# EAGLE board STM32F765VIT6 EAGLE (EAGLE 7.5.0)
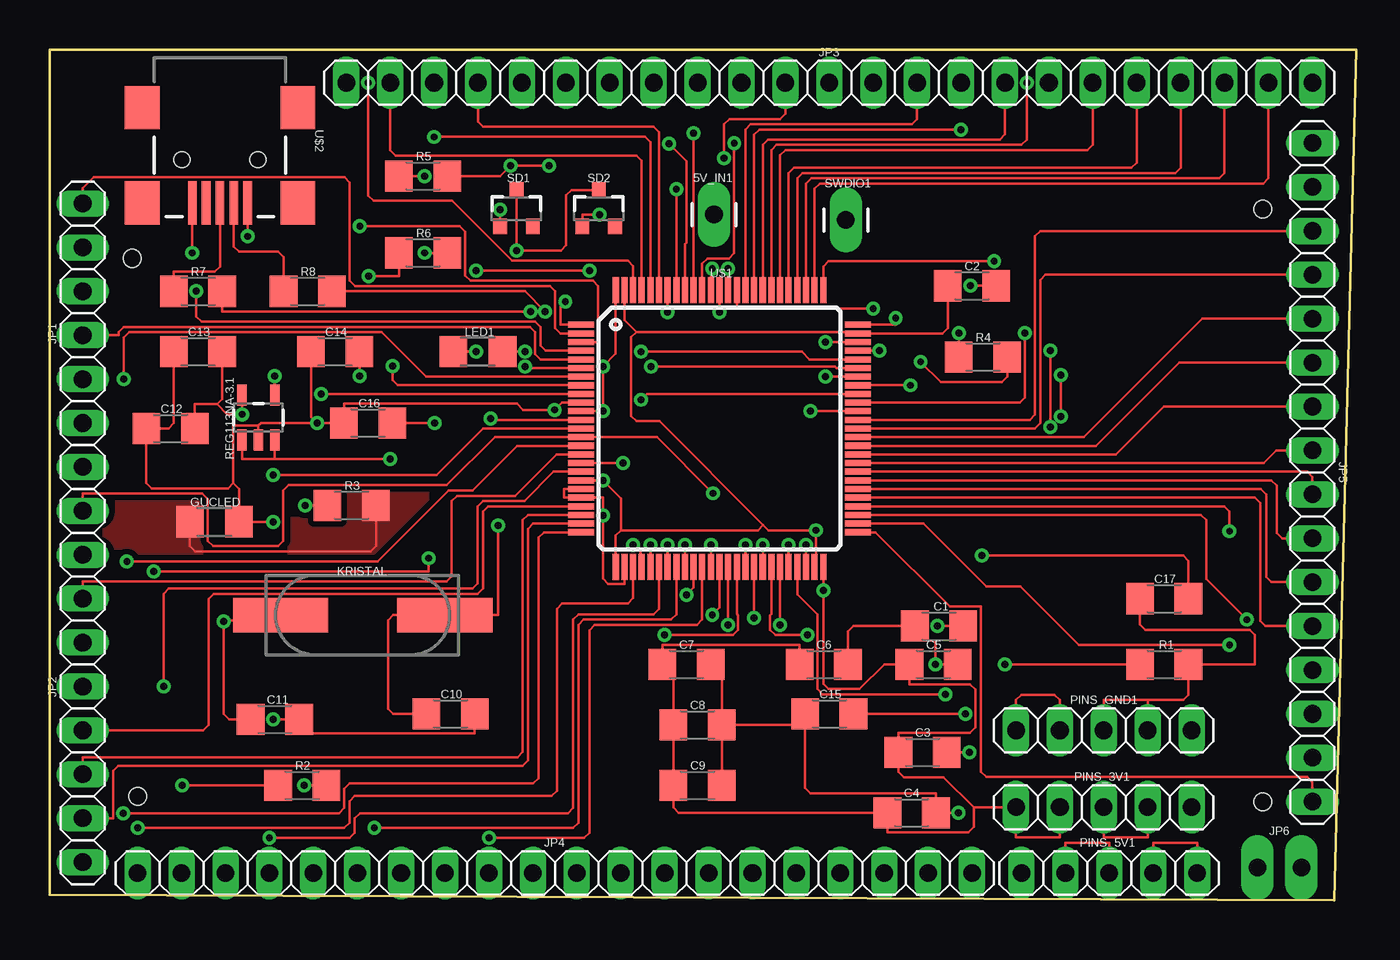
[diagram p0: board, top side]
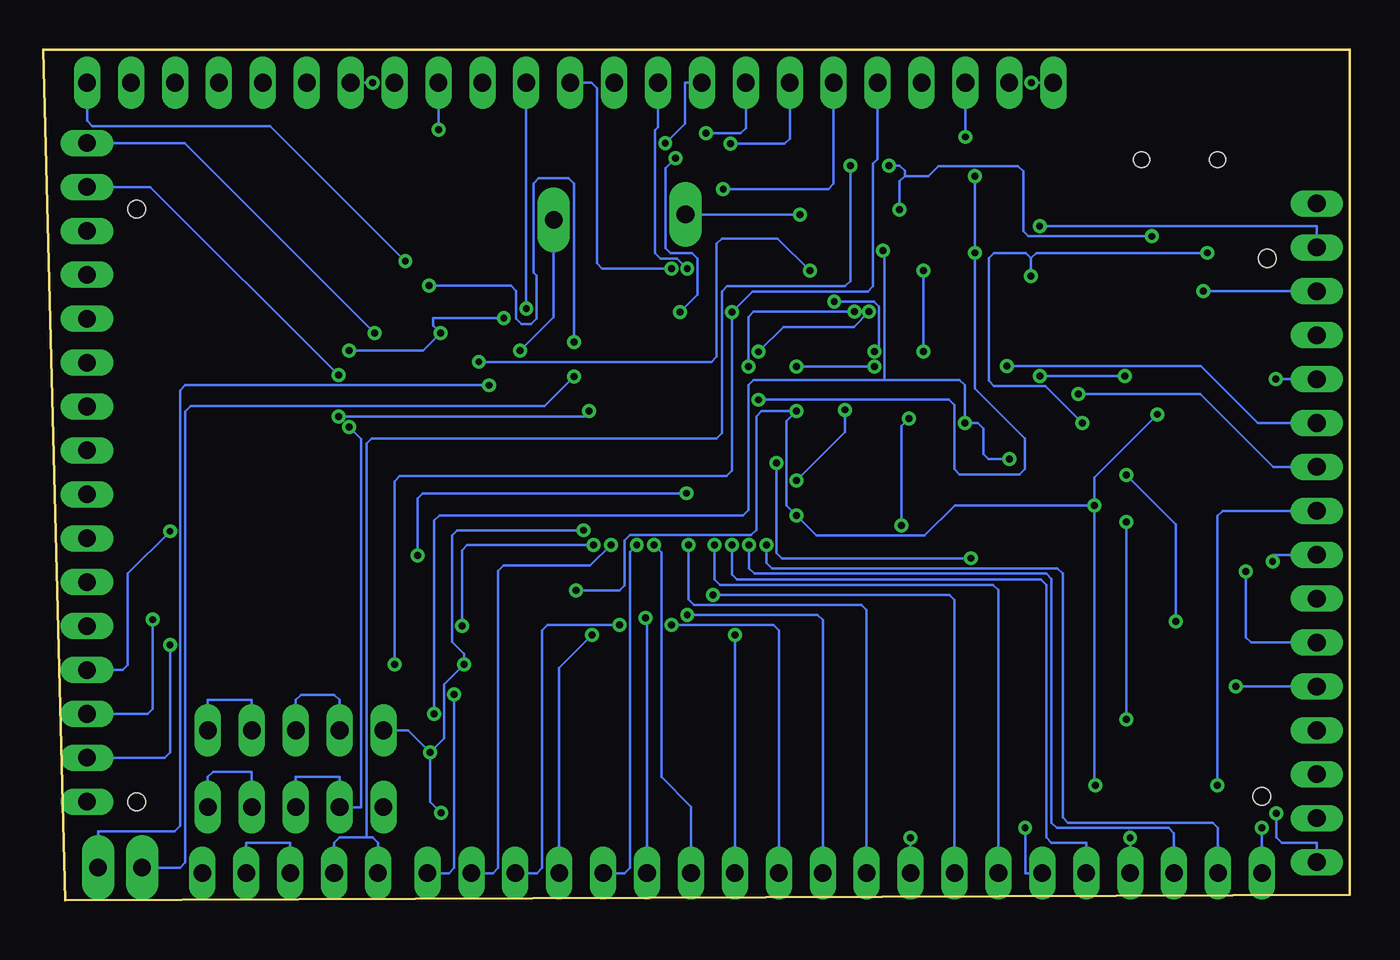
[diagram p1: board, bottom side, seen from below]

Size 75.56 x 49.21 mm. Coordinates in mm from the lower left corner, seen from the top.
Outline: 0,49.21 0,0.32 74.3,0 75.56,49.21 0,49.21
Copper layers (1*16): Top 0.035mm / dielectric 1.5mm / Bottom 0.035mm
Design rules "default *": minimum track width 10mil, minimum drill 0.61mm, track to track 8mil, track to pad 8mil, pad to pad 8mil, via to via 8mil, smd to smd 8mil, copper to edge 40mil, drill to drill 8mil, minimum pad ring 0mil, minimum via ring 8mil, stop-mask expansion 2mil, vias tented up to drill 16mil, thermal gap 10mil
Net classes: 0 default: width 0.152 mm, clearance 0.152 mm
Holes 1 mm at 70.17,40.01 70.17,5.72 5.08,6.03 4.76,37.15

## Footprints (pad centres in the part's own frame; a part is rotated, then mirrored left to right if it is on the bottom)
1X01_LONGPAD = drill 1.016 pad 1.88 long: 1 0,0
1206 = smd 1.6 x 1.8: 1 -1.4,0; 2 1.4,0
1206_GUCLED = smd 1.6 x 1.803: 1 -1.422,0; 2 1.422,0
1X07 = drill 1.016 pad 1.524 long: 1 -7.62,0; 2 -5.08,0; 3 -2.54,0; 4 0,0; 5 2.54,0; 6 5.08,0; 7 7.62,0
1X09 = drill 1.016 pad 1.524 long: 1 -10.16,0; 2 -7.62,0; 3 -5.08,0; 4 -2.54,0; 5 0,0; 6 2.54,0; 7 5.08,0; 8 7.62,0; 9 10.16,0
1X23 = drill 1.016 pad 1.524 long: 1 -26.67,0; 2 -24.13,0; 3 -21.59,0; 4 -19.05,0; 5 -16.51,0; 6 -13.97,0; 7 -11.43,0; 8 -8.89,0; 9 -6.35,0; 10 -3.81,0; 11 -1.27,0; 12 1.27,0; 13 3.81,0; 14 6.35,0; 15 8.89,0; 16 11.43,0; 17 13.97,0; 18 16.51,0; 19 19.05,0; 20 21.59,0; 21 24.13,0; 22 26.67,0; 23 29.21,0
1X20 = drill 1.016 pad 1.524 long: 1 -24.13,0; 2 -21.59,0; 3 -19.05,0; 4 -16.51,0; 5 -13.97,0; 6 -11.43,0; 7 -8.89,0; 8 -6.35,0; 9 -3.81,0; 10 -1.27,0; 11 1.27,0; 12 3.81,0; 13 6.35,0; 14 8.89,0; 15 11.43,0; 16 13.97,0; 17 16.51,0; 18 19.05,0; 19 21.59,0; 20 24.13,0
1X16 = drill 1.016 pad 1.524 long: 1 -19.05,0; 2 -16.51,0; 3 -13.97,0; 4 -11.43,0; 5 -8.89,0; 6 -6.35,0; 7 -3.81,0; 8 -1.27,0; 9 1.27,0; 10 3.81,0; 11 6.35,0; 12 8.89,0; 13 11.43,0; 14 13.97,0; 15 16.51,0; 16 19.05,0
1X02_LONGPADS = drill 1.016 pad 1.88 long: 1 0,0; 2 2.54,0
CSM-7X-DU = smd 5.5 x 2: 1 -4.75,0; 2 4.75,0
1X05 = drill 1.016 pad 1.524 long: 1 -5.08,0; 2 -2.54,0; 3 0,0; 4 2.54,0; 5 5.08,0
SOT23-5 = smd 0.55 x 1.2: 1 -0.95,-1.3; 2 0,-1.3; 3 0.95,-1.3; 4 0.95,1.3; 5 -0.95,1.3
SOT23-3 = smd 0.8 x 0.9: 1 -0.95,-1; 2 0.95,-1; 3 0,1.1
LQFP100 = smd 1.5 x 0.35: 1 -8,6; 2 -8,5.5; 3 -8,5; 4 -8,4.5; 5 -8,4; 6 -8,3.5; 7 -8,3; 8 -8,2.5; 9 -8,2; 10 -8,1.5; 11 -8,1; 12 -8,0.5; 13 -8,0; 14 -8,-0.5; 15 -8,-1; 16 -8,-1.5; 17 -8,-2; 18 -8,-2.5; 19 -8,-3; 20 -8,-3.5; 21 -8,-4; 22 -8,-4.5; 23 -8,-5; 24 -8,-5.5; 25 -8,-6; 51 8,-6; 52 8,-5.5; 53 8,-5; 54 8,-4.5; 55 8,-4; 56 8,-3.5; 57 8,-3; 58 8,-2.5; 59 8,-2; 60 8,-1.5; 61 8,-1; 62 8,-0.5; 63 8,0; 64 8,0.5; 65 8,1; 66 8,1.5; 67 8,2; 68 8,2.5; 69 8,3; 70 8,3.5; 71 8,4; 72 8,4.5; 73 8,5; 74 8,5.5; 75 8,6 | smd 0.35 x 1.5: 26 -6,-8; 27 -5.5,-8; 28 -5,-8; 29 -4.5,-8; 30 -4,-8; 31 -3.5,-8; 32 -3,-8; 33 -2.5,-8; 34 -2,-8; 35 -1.5,-8; 36 -1,-8; 37 -0.5,-8; 38 0,-8; 39 0.5,-8; 40 1,-8; 41 1.5,-8; 42 2,-8; 43 2.5,-8; 44 3,-8; 45 3.5,-8; 46 4,-8; 47 4.5,-8; 48 5,-8; 49 5.5,-8; 50 6,-8; 76 6,8; 77 5.5,8; 78 5,8; 79 4.5,8; 80 4,8; 81 3.5,8; 82 3,8; 83 2.5,8; 84 2,8; 85 1.5,8; 86 1,8; 87 0.5,8; 88 0,8; 89 -0.5,8; 90 -1,8; 91 -1.5,8; 92 -2,8; 93 -2.5,8; 94 -3,8; 95 -3.5,8; 96 -4,8; 97 -4.5,8; 98 -5,8; 99 -5.5,8; 100 -6,8
USB-MINIB = smd 2.5 x 0.5: D+ 2.5,0; D- 2.5,0.8; GND 2.5,-1.6; ID 2.5,-0.8; VBUS 2.5,1.6 | smd 2.5 x 2: MTN1 -3,4.5; MTN2 2.5,4.5; MTN3 -3,-4.5; MTN4 2.5,-4.5 | hole 0.9: 0,2.2; 0,-2.2

## Placement (x,y rotation side)
5V_IN1  M01PTH_LONGPAD (M01)  [1X01_LONGPAD]  38.42,39.69 0 top
C1  2uF2  [1206]  51.44,15.88 0 top
C2  2uF2  [1206]  53.34,35.56 0 top
C3  100nF  [1206]  50.48,8.57 0 top
C4  100nF  [1206]  49.85,5.08 0 top
C5  100nF  [1206]  51.12,13.65 0 top
C6  100nF  [1206]  44.77,13.65 0 top
C7  100nF  [1206]  36.83,13.65 0 top
C8  10nF  [1206]  37.47,10.16 0 top
C9  2uF2  [1206]  37.47,6.67 0 top
C10  18pF  [1206]  23.18,10.8 0 top
C11  18pF  [1206]  13.02,10.48 0 top
C12  10nF  [1206]  6.99,27.3 0 top
C13  10nF  [1206]  8.57,31.75 0 top
C14  10nF  [1206]  16.51,31.75 0 top
C15  10nF  [1206]  45.09,10.8 0 top
C16  10nF  [1206]  18.42,27.62 0 top
C17  100nF  [1206]  64.45,17.46 0 top
GUCLED  GREEN  [1206_GUCLED]  9.53,21.91 0 top
JP1  PINHD-1X07_2.54 (PINHD-1X07)  [1X07]  1.91,32.7 90 top
JP2  PINHD-1X09_2.54 (PINHD-1X09)  [1X09]  1.91,12.38 90 top
JP3  PINHD-1X23_2.54 (PINHD-1X23)  [1X23]  43.82,47.31 0 top
JP4  PINHD-1X20_2.54 (PINHD-1X20)  [1X20]  29.21,1.59 0 top
JP5  PINHD-1X16_2.54 (PINHD-1X16)  [1X16]  73.03,24.77 270 top
JP6  M02  [1X02_LONGPADS]  69.85,1.91 0 top
KRISTAL  8MHZ  [CSM-7X-DU]  18.1,16.51 0 top
LED1  BLUE  [1206_GUCLED]  24.77,31.75 0 top
PINS_3V1  PINHD-1X05_2.54 (PINHD-1X05)  [1X05]  60.96,5.4 0 top
PINS_5V1  PINHD-1X05_2.54 (PINHD-1X05)  [1X05]  61.28,1.59 0 top
PINS_GND1  PINHD-1X05_2.54 (PINHD-1X05)  [1X05]  60.96,9.84 0 top
R1  10K  [1206]  64.45,13.65 0 top
R2  10K  [1206]  14.61,6.67 0 top
R3  330  [1206]  17.46,22.86 0 top
R4  330  [1206]  53.98,31.43 0 top
R5  15K  [1206]  21.59,41.91 0 top
R6  22K  [1206]  21.59,37.47 0 top
R7  22  [1206]  8.57,35.24 0 top
R8  22  [1206]  14.92,35.24 0 top
REG113NA-3.1  V_REG_LDOSMD (V_REG_LDO)  [SOT23-5]  12.07,27.94 0 top
SD1  400mA/40V/470mV  [SOT23-3]  26.99,40.01 0 top
SD2  400mA/40V/470mV  [SOT23-3]  31.75,40.01 0 top
SWDIO1  M01PTH_LONGPAD (M01)  [1X01_LONGPAD]  46.04,39.37 0 top
U$1  STM32F765VIT6  [LQFP100]  38.74,27.3 0 top
U$2  USB-MINIB-5PIN (USB-MINIB)  [USB-MINIB]  9.84,42.86 270 top

## Library data of the parts
5V_IN1 C1-C17 GUCLED JP1-JP6 LED1 PINS_3V1 PINS_5V1 PINS_GND1 R1-R8 REG113NA-3.1 SWDIO1 U$1 U$2 = common
KRISTAL = common; OC_FARNELL: unknown; OC_NEWARK: unknown
SD1 SD2 = common; PROD_ID: DIO-08411

## Nets
2_PE3: JP1.7 U$1.2
3_PE4: JP1.6 U$1.3
3V3: C3.1 C4.1 C5.1 C6.1 C7.1 C8.1 C9.1 C12.2 C13.2 PINS_3V1.1 PINS_3V1.2 PINS_3V1.3 PINS_3V1.4 PINS_3V1.5 R2.2 R3.1 R4.1 REG113NA-3.1.5 U$1.6 U$1.11 U$1.20 U$1.21 U$1.27 U$1.50 U$1.75 U$1.100
4_PE5: JP1.5 U$1.4
5_PE6: JP1.4 U$1.5
5V: 5V_IN1.1 SD2.1
7_PC13: JP1.3 U$1.7
8_PC14: JP1.2 U$1.8
9_PC15: JP1.1 U$1.9
15_PC0: JP2.8 U$1.15
16_PC1: JP2.7 U$1.16
17_PC2: JP2.6 U$1.17
18_PC3: JP2.5 U$1.18
22_PA0: JP2.4 U$1.22
23_PA1: JP2.3 U$1.23
24_PA2: JP2.2 U$1.24
25_PA3: JP2.1 U$1.25
28_PA4: JP4.1 U$1.28
29_PA5: JP4.2 U$1.29
30_PA6: JP4.3 U$1.30
31_PA7: JP4.4 U$1.31
32_PC4: JP4.5 U$1.32
33_PC5: JP4.6 U$1.33
34_PB0: JP4.7 U$1.34
35_PB1: JP4.8 U$1.35
36_PB2: JP4.9 U$1.36
37_PE7: JP4.10 U$1.37
38_PE8: JP4.11 U$1.38
39_PE9: JP4.12 U$1.39
40_PE10: JP4.13 U$1.40
41_PE11: JP4.14 U$1.41
42_PE12: JP4.15 U$1.42
43_PE13: JP4.16 U$1.43
44_PE14: JP4.17 U$1.44
45_PE15: JP4.18 U$1.45
51_PB12: JP5.16 U$1.51
52_PB13: JP5.15 U$1.52
53_PB14: JP5.14 U$1.53
54_PB15: JP5.13 U$1.54
55_PD8: JP5.12 U$1.55
56_PD9: JP5.11 U$1.56
57_PD10: JP5.10 U$1.57
58_PD11: JP5.9 U$1.58
61_PD14: JP5.6 U$1.61
62_PD15: JP5.5 U$1.62
63_PC6: JP5.4 U$1.63
64_PC7: JP5.3 U$1.64
65_PC8: JP5.2 U$1.65
66_PC9: JP5.1 U$1.66
68_PA9: JP6.2 U$1.68
69_PA10: JP6.1 U$1.69
77_PA15: JP3.22 U$1.77
78_PC10: JP3.21 U$1.78
79_PC11: JP3.20 U$1.79
80_PC12: JP3.19 U$1.80
81_PD0: JP3.18 U$1.81
82_PD1: JP3.17 U$1.82
83_PD2: JP3.16 U$1.83
84_PD3: JP3.15 U$1.84
85_PD4: JP3.14 U$1.85
86_PD5: JP3.13 U$1.86
87_PD6: JP3.12 U$1.87
88_PD7: JP3.11 U$1.88
89_PB3: JP3.10 U$1.89
90_PB4: JP3.9 U$1.90
91_PB5: JP3.8 U$1.91
92_PB6: JP3.7 U$1.92
93_PB7: JP3.6 U$1.93
97_PE0: JP3.2 U$1.97
98_PE1: JP3.1 U$1.98
BOOT0: JP3.5 R1.1 U$1.94
GND: C1.1 C2.1 C3.2 C4.2 C5.2 C6.2 C7.2 C8.2 C9.2 C10.2 C11.2 C12.1 C13.1 C14.1 C15.1 C16.1 C17.1 GUCLED.2 PINS_GND1.1 PINS_GND1.2 PINS_GND1.3 PINS_GND1.4 PINS_GND1.5 R1.2 R6.1 REG113NA-3.1.2 U$1.10 U$1.19 U$1.26 U$1.49 U$1.74 U$1.99 U$2.GND
I2C1_SCL: JP3.4 U$1.95
I2C1_SDA: JP3.3 U$1.96
I2C2_SCL: JP4.19 U$1.46
I2C2_SDA: JP4.20 U$1.47
I2C4_SCL: JP5.8 U$1.59
I2C4_SDA: JP5.7 U$1.60
LED1: LED1.2 U$1.1
N$1: GUCLED.1 R3.2
N$2: LED1.1 R4.2
N$3: C15.2 C16.2 REG113NA-3.1.1 REG113NA-3.1.3 SD1.3 SD2.3
N$5: R8.1 U$2.D-
N$6: R7.1 U$2.D+
NR: C14.2 REG113NA-3.1.4
OSC_IN: C10.1 KRISTAL.2 U$1.12
OSC_OUT: C11.1 KRISTAL.1 U$1.13
PA8: R5.1 R6.2 U$1.67
RESET: C17.2 JP2.9 R2.1 U$1.14
SWDCLK: JP3.23 U$1.76
SWDIO: SWDIO1.1 U$1.72
USBDM: R8.2 U$1.70
USBDP: R7.2 U$1.71
VCAP1: C1.2 U$1.48
VCAP2: C2.2 U$1.73
VUSB: PINS_5V1.1 PINS_5V1.2 PINS_5V1.3 PINS_5V1.4 PINS_5V1.5 R5.2 SD1.1 U$2.VBUS

## Tracks (layer width: path | path; a pad name or v marks a point on that pad's centre or on a via)
2_PE3
  Top 0.152: U$1.2 29.54,32.8 29.24,33.11 29.24,35.24 28.93,35.55 17.66,35.55 17.35,35.85 17.35,41.54 17.05,41.84 2.53,41.84 1.91,41.22 JP1.7
3_PE4  (via drill 0.4 pad 0.7)
  Top 0.152: v17.93,39 23.71,39 24.02,38.7 24.02,36.16 24.32,35.85 31.41,35.85 31.71,35.55 31.71,32.3 U$1.3
  Bottom 0.152: v17.93,39 1.91,39 JP1.6
3V3  (via drill 0.4 pad 0.7)
  Top 0.152: C6.1 43.37,14.78 35.43,14.78 C7.1 36.07,13.65 C8.1 C9.1 36.07,5.39 36.37,5.08 C4.1 48.45,3.95 53.13,3.95 53.44,4.26 53.44,5.4 | C13.2 9.97,29.01 9.67,28.71 | 9.67,28.71 10.25,28.13 v11.12,28.13 REG113NA-3.1.5 | U$1.11 v31.99,28.3 v31.99,30.89 32.73,31.63 U$1.100 | U$1.20 29.76,23.8 29.76,23.3 U$1.21 31.99,23.3 v31.99,22.28 31.99,18.63 32.3,18.33 33.23,18.33 U$1.27 | v52.58,32.84 R4.1 | PINS_3V1.2 58.42,3.65 55.88,3.65 PINS_3V1.1 53.44,5.4 | PINS_3V1.3 60.96,3.65 63.5,3.65 PINS_3V1.4 | v57.87,27.39 v57.87,31.82 | v14.7,6.67 R2.2 | 9.67,28.71 8.39,28.71 C12.2 | v14.76,22.86 R3.1 | U$1.50 v44.73,17.93 44.73,12.53 45.04,12.23 46.84,12.23 48.26,13.65 C5.1 49.72,12.51 53.23,12.51 53.53,12.2 53.53,10.01 53.23,9.7 49.08,9.7 C3.1 49.08,7.44 49.39,7.14 51.7,7.14 53.44,5.4 | v48.93,33.7 48.93,33.3 U$1.75 | v27.49,30.89 27.57,30.8 U$1.6
  Bottom 0.152: v11.12,28.13 14.76,24.48 v14.76,22.86 | PINS_3V1.4 63.5,7.46 65.73,7.46 66.04,7.15 PINS_3V1.5 | v48.93,33.7 53,33.7 53,33.27 v52.58,32.84 53.59,31.82 v57.87,31.82 | v31.99,30.89 v27.49,30.89 | v57.87,27.39 57.18,26.69 57.18,5.4 PINS_3V1.2 58.42,7.15 60.96,7.15 PINS_3V1.3 | v14.76,22.86 14.76,6.73 v14.7,6.67 | v44.73,17.93 42.24,17.93 41.94,18.24 41.94,20.84 41.63,21.14 34.62,21.14 34.31,21.45 34.31,28 34.01,28.3 v31.99,28.3 32.57,27.72 32.57,22.86 v31.99,22.28 30.83,21.11 24.59,21.11 22.84,22.86 v14.76,22.86
4_PE5  (via drill 0.4 pad 0.7)
  Top 0.152: v8.48,35.24 8.48,33.79 8.78,33.49 28.07,33.49 28.38,33.18 28.38,32.11 28.68,31.8 U$1.4
  Bottom 0.152: v8.48,35.24 JP1.5 | JP1.5
5_PE6
  Top 0.152: U$1.5 28.38,31.3 28.07,31.61 28.07,32.88 27.77,33.18 4.28,33.18 3.98,32.88 3.98,32.7 JP1.4
5V  (via drill 0.4 pad 0.7)
  Top 0.152: v31.8,39.69 30.8,39.69 SD2.1
  Bottom 0.152: v31.8,39.69 5V_IN1.1
7_PC13  (via drill 0.4 pad 0.7)
  Top 0.152: v4.28,30.16 4.28,32.57 4.59,32.88 19.2,32.88 21.78,30.3 U$1.7
  Bottom 0.152: v4.28,30.16 JP1.3 | JP1.3
8_PC14  (via drill 0.4 pad 0.7)
  Top 0.152: U$1.8 20.13,29.8 19.82,30.11 v19.82,30.93
  Bottom 0.152: v19.82,30.93 8.62,30.93 5.32,27.62 JP1.2
9_PC15  (via drill 0.4 pad 0.7)
  Top 0.152: v15.69,29.3 U$1.9
  Bottom 0.152: v15.69,29.3 8.64,29.3 4.41,25.08 JP1.1
15_PC0  (via drill 0.4 pad 0.7)
  Top 0.152: v4.46,19.62 18.96,19.62 23.07,23.72 24.44,23.72 27.03,26.3 U$1.15
  Bottom 0.152: v4.46,19.62 4.46,20 JP2.8
16_PC1
  Top 0.152: U$1.16 29.3,25.8 26.91,23.41 23.56,23.41 23.25,23.11 23.25,18.76 22.95,18.45 1.91,18.45 JP2.7
17_PC2  (via drill 0.4 pad 0.7)
  Top 0.152: v33.15,25.3 U$1.17 | v6,19.03 21.9,19.03 v21.9,19.8
  Bottom 0.152: v21.9,19.8 32.85,19.8 33.15,20.11 v33.15,25.3 | v6,19.03 6,15.23 5.7,14.92 JP2.6
18_PC3  (via drill 0.4 pad 0.7)
  Top 0.152: v6.58,12.38 6.58,17.74 6.89,18.04 24.44,18.04 24.74,18.35 24.74,22.8 25.05,23.11 27.45,23.11 29.15,24.8 U$1.18
  Bottom 0.152: v6.58,12.38 JP2.5
22_PA0
  Top 0.152: U$1.22 25.35,22.8 25.05,22.5 25.05,18.04 24.74,17.74 9.48,17.74 9.18,17.43 9.18,10.15 8.87,9.84 JP2.4
23_PA1
  Top 0.152: U$1.23 27.66,22.3 27.36,22 27.36,8.6 27.05,8.29 1.91,8.29 JP2.3
24_PA2
  Top 0.152: U$1.24 27.97,21.8 27.66,21.5 27.66,8.1 27.36,7.8 3.96,7.8 3.66,7.49 3.66,4.76 JP2.2
25_PA3  (via drill 0.4 pad 0.7)
  Top 0.152: v4.24,5.05 16.73,5.05 17.03,5.36 17.03,6.46 17.34,6.77 27.97,6.77 28.27,7.07 28.27,21 28.58,21.3 U$1.25
  Bottom 0.152: v4.24,5.05 4.24,3.65 3.93,3.34 1.91,3.34 JP2.1
28_PA4  (via drill 0.4 pad 0.7)
  Top 0.152: v5.08,4.2 17.03,4.2 17.34,4.5 17.34,5.74 17.64,6.04 29.03,6.04 29.33,6.35 29.33,16.88 29.64,17.18 33.43,17.18 33.74,17.49 U$1.28
  Bottom 0.152: v5.08,4.2 JP4.1
29_PA5  (via drill 0.4 pad 0.7)
  Top 0.152: v33.73,20.56 33.8,20.56 34.15,20.21 34.15,19.3 U$1.29
  Bottom 0.152: v33.73,20.56 33.73,19.52 33.43,19.22 16.9,19.22 16.6,18.91 16.6,4.81 16.29,4.5 7.93,4.5 7.62,4.2 JP4.2
30_PA6  (via drill 0.4 pad 0.7)
  Top 0.152: v34.74,20.56 U$1.30
  Bottom 0.152: v34.74,20.56 34.74,19.22 34.43,18.91 17.55,18.91 17.25,18.61 17.25,4.5 16.94,4.2 10.47,4.2 10.16,3.89 JP4.3
31_PA7  (via drill 0.4 pad 0.7)
  Top 0.152: v12.7,3.62 17.34,3.62 17.64,3.92 17.64,4.75 17.95,5.05 29.97,5.05 30.27,5.36 30.27,16.25 30.58,16.55 34.93,16.55 35.24,16.86 U$1.31
  Bottom 0.152: v12.7,3.62 JP4.4
32_PC4  (via drill 0.4 pad 0.7)
  Top 0.152: v35.74,20.56 U$1.32
  Bottom 0.152: v35.74,20.56 35.74,18.88 35.43,18.57 17.86,18.57 17.55,18.27 17.55,3.65 17.25,3.34 15.24,3.34 JP4.5
33_PC5  (via drill 0.4 pad 0.7)
  Top 0.152: v18.77,4.2 30.27,4.2 30.58,4.5 30.58,15.94 30.88,16.25 35.93,16.25 36.24,16.55 U$1.33
  Bottom 0.152: v18.77,4.2 18.77,1.59 JP4.6
34_PB0  (via drill 0.4 pad 0.7)
  Top 0.152: v36.74,20.56 U$1.34
  Bottom 0.152: v36.74,20.56 36.74,18.57 36.43,18.27 20.63,18.27 20.32,17.96 JP4.7
35_PB1  (via drill 0.4 pad 0.7)
  Top 0.152: v36.82,17.69 37.24,18.11 U$1.35
  Bottom 0.152: v36.82,17.69 23.17,17.69 22.86,17.38 JP4.8
36_PB2  (via drill 0.4 pad 0.7)
  Top 0.152: v25.4,3.62 30.9,3.62 31.2,3.92 31.2,15.64 31.51,15.94 37.43,15.94 37.74,16.25 U$1.36
  Bottom 0.152: v25.4,3.62 JP4.9
37_PE7  (via drill 0.4 pad 0.7)
  Top 0.152: v38.24,20.56 U$1.37
  Bottom 0.152: v38.24,20.56 38.24,17.41 37.93,17.11 28.25,17.11 27.94,16.8 JP4.10
38_PE8  (via drill 0.4 pad 0.7)
  Top 0.152: v38.32,16.52 38.74,16.94 U$1.38
  Bottom 0.152: v38.32,16.52 30.79,16.52 30.48,16.22 JP4.11
39_PE9  (via drill 0.4 pad 0.7)
  Top 0.152: v39.24,15.94 U$1.39
  Bottom 0.152: v39.24,15.94 33.33,15.94 33.02,15.64 JP4.12
40_PE10  (via drill 0.4 pad 0.7)
  Top 0.152: v35.56,15.36 39.51,15.36 39.82,15.67 39.82,16.48 39.74,16.57 U$1.40
  Bottom 0.152: v35.56,15.36 JP4.13
41_PE11  (via drill 0.4 pad 0.7)
  Top 0.152: v40.24,20.56 U$1.41
  Bottom 0.152: v40.24,20.56 39.82,20.14 39.82,7.15 38.1,5.43 JP4.14
42_PE12  (via drill 0.4 pad 0.7)
  Top 0.152: v40.74,16.36 U$1.42
  Bottom 0.152: v40.74,16.36 40.64,16.26 JP4.15
43_PE13  (via drill 0.4 pad 0.7)
  Top 0.152: v41.24,20.56 U$1.43
  Bottom 0.152: v41.24,20.56 41.63,20.16 41.63,1.89 41.94,1.59 JP4.16
44_PE14  (via drill 0.4 pad 0.7)
  Top 0.152: v43.82,15.36 41.96,15.36 41.65,15.67 41.65,16.48 41.73,16.57 U$1.44
  Bottom 0.152: v43.82,15.36 45.72,13.46 JP4.17
45_PE15  (via drill 0.4 pad 0.7)
  Top 0.152: v42.23,15.94 U$1.45
  Bottom 0.152: v42.23,15.94 46.41,15.94 46.71,15.64 46.71,1.89 47.02,1.59 JP4.18
51_PB12
  Top 0.152: U$1.51 47.75,21.3 52.06,17 53.86,17 53.86,7.46 54.17,7.15 72.72,7.15 73.03,6.85 JP5.16
52_PB13  (via drill 0.4 pad 0.7)
  Top 0.152: v68.23,14.78 59.53,14.78 56.14,18.17 54.16,18.17 50.53,21.8 U$1.52
  Bottom 0.152: v68.23,14.78 68.23,8.56 68.54,8.26 JP5.15
53_PB14  (via drill 0.4 pad 0.7)
  Top 0.152: v69.23,16.25 66.88,18.59 66.88,22 66.58,22.3 U$1.53
  Bottom 0.152: JP5.14 69.53,10.8 69.23,11.1 v69.23,16.25
54_PB15  (via drill 0.4 pad 0.7)
  Top 0.152: v68.23,21.36 68.23,22.5 67.93,22.8 U$1.54
  Bottom 0.152: v68.23,21.36 70.67,18.92 70.67,13.64 70.98,13.34 JP5.13
55_PD8
  Top 0.152: U$1.55 69.7,23.3 70.01,23 70.01,16.18 70.31,15.88 JP5.12
56_PD9
  Top 0.152: U$1.56 70.05,23.8 70.36,23.5 70.36,18.72 70.66,18.41 JP5.11
57_PD10
  Top 0.152: U$1.57 70.66,24.3 70.97,24 70.97,21.26 71.27,20.95 JP5.10
58_PD11
  Top 0.152: U$1.58 72.72,24.8 73.03,24.5 JP5.9
61_PD14
  Top 0.152: U$1.61 60.51,26.3 65.32,31.12 JP5.6
62_PD15
  Top 0.152: U$1.62 59.8,26.8 66.65,33.66 JP5.5
63_PC6
  Top 0.152: U$1.63 56.98,27.3 57.29,27.61 57.29,35.89 57.59,36.2 JP5.4
64_PC7
  Top 0.152: U$1.64 56.68,27.8 56.98,28.11 56.98,38.43 57.29,38.73 JP5.3
65_PC8  (via drill 0.4 pad 0.7)
  Top 0.152: v43.98,28.3 U$1.65 | v58.48,30.39 v58.48,27.99
  Bottom 0.152: v58.48,27.99 44.3,27.99 v43.98,28.3 | v58.48,30.39 69.37,41.27 JP5.2
66_PC9  (via drill 0.4 pad 0.7)
  Top 0.152: v56.4,32.84 56.4,29.11 56.1,28.8 U$1.66
  Bottom 0.152: v56.4,32.84 67.38,43.81 JP5.1
68_PA9  (via drill 0.4 pad 0.7)
  Top 0.152: v49.79,29.8 U$1.68
  Bottom 0.152: v49.79,29.8 67.35,29.8 67.65,29.5 67.65,4.32 67.96,4.01 72.39,4.01 JP6.2
69_PA10  (via drill 0.4 pad 0.7)
  Top 0.152: v44.87,30.3 U$1.69
  Bottom 0.152: v44.87,30.3 46.57,28.61 67.04,28.61 67.35,28.3 67.35,2.21 67.65,1.91 JP6.1
77_PA15
  Top 0.152: U$1.77 44.23,41.17 44.54,41.48 70.18,41.48 70.49,41.78 JP3.22
78_PC10
  Top 0.152: U$1.78 43.73,41.48 44.04,41.78 67.64,41.78 67.95,42.09 JP3.21
79_PC11
  Top 0.152: U$1.79 43.23,41.78 43.54,42.09 65.1,42.09 65.41,42.39 JP3.20
80_PC12
  Top 0.152: U$1.80 42.73,42.09 43.04,42.39 62.56,42.39 62.87,42.7 JP3.19
81_PD0
  Top 0.152: U$1.81 42.23,43.1 42.54,43.41 60.02,43.41 60.33,43.71 JP3.18
82_PD1  (via drill 0.4 pad 0.7)
  Top 0.152: v56.51,47.31 56.51,44.02 56.21,43.71 42.04,43.71 41.73,43.41 U$1.82
  Bottom 0.152: v56.51,47.31 JP3.17
83_PD2
  Top 0.152: U$1.83 41.24,43.71 41.54,44.02 54.94,44.02 55.25,44.32 JP3.16
84_PD3  (via drill 0.4 pad 0.7)
  Top 0.152: v52.71,44.6 41.04,44.6 40.74,44.29 U$1.84
  Bottom 0.152: v52.71,44.6 JP3.15
85_PD4
  Top 0.152: U$1.85 40.24,44.6 40.54,44.9 49.86,44.9 50.17,45.21 JP3.14
86_PD5  (via drill 0.4 pad 0.7)
  Top 0.152: v47.62,34.24 39.74,34.24 U$1.86
  Bottom 0.152: v47.62,34.24 JP3.13
87_PD6  (via drill 0.4 pad 0.7)
  Top 0.152: v39.24,36.56 U$1.87
  Bottom 0.152: v39.24,36.56 43.23,36.56 43.54,36.87 43.54,47 43.84,47.31 JP3.12
88_PD7  (via drill 0.4 pad 0.7)
  Top 0.152: v38.74,34.05 U$1.88 | v39.01,42.95 39.01,44.9 39.31,45.21 42.24,45.21 42.55,45.51 JP3.11
  Bottom 0.152: v39.01,42.95 39.59,42.37 39.59,37.75 39.28,37.45 38.04,37.45 37.74,37.14 37.74,35.05 v38.74,34.05
89_PB3  (via drill 0.4 pad 0.7)
  Top 0.152: v38.32,36.56 38.24,36.48 U$1.89
  Bottom 0.152: v38.32,36.56 38.9,37.14 39.86,37.14 40.17,37.45 40.17,44.58 40.01,44.74 JP3.10
90_PB4  (via drill 0.4 pad 0.7)
  Top 0.152: v39.59,43.81 39.59,37.45 39.28,37.14 38.04,37.14 37.74,36.84 U$1.90
  Bottom 0.152: v39.59,43.81 38.46,44.94 38.46,47.31 JP3.9
91_PB5  (via drill 0.4 pad 0.7)
  Top 0.152: v37.24,44.38 U$1.91
  Bottom 0.152: v37.24,44.38 35.23,44.38 34.93,44.69 JP3.8
92_PB6  (via drill 0.4 pad 0.7)
  Top 0.152: v35.82,43.78 36.82,42.77 36.82,38.05 36.74,37.97 U$1.92
  Bottom 0.152: v35.82,43.78 32.69,43.78 32.39,44.08 JP3.7
93_PB7  (via drill 0.4 pad 0.7)
  Top 0.152: v36.24,41.16 U$1.93
  Bottom 0.152: v36.24,41.16 30.15,41.16 29.85,41.47 JP3.6
97_PE0
  Top 0.152: U$1.97 34.24,42.79 33.93,43.1 19.99,43.1 19.69,43.4 JP3.2
98_PE1  (via drill 0.4 pad 0.7)
  Top 0.152: v18.41,47.31 18.41,40.78 18.72,40.48 23.26,40.48 26.72,37.01 33.43,37.01 33.74,36.71 U$1.98
  Bottom 0.152: v18.41,47.31 JP3.1
BOOT0  (via drill 0.4 pad 0.7)
  Top 0.152: v55.24,13.65 R1.1 | v35.74,34.05 U$1.94
  Bottom 0.152: JP3.5 27.31,42.89 27.57,42.62 27.57,35.54 27.87,35.23 34.55,35.23 v35.74,34.05 35.74,24.86 36.04,24.56 54.94,24.56 55.24,24.25 v55.24,13.65
GND  (via drill 0.4 pad 0.7)
  Top 0.152: C13.1 7.17,27.61 6.87,27.3 C12.1 5.59,24.14 5.89,23.84 10.31,23.84 10.61,24.14 | C17.1 63.05,15.97 63.36,15.67 69.4,15.67 69.7,15.36 69.7,13.65 R1.2 65.85,11.9 65.55,11.59 63.5,11.59 | C2.1 51.94,33.11 51.64,32.8 U$1.74 46.27,32.8 46.19,32.89 33.93,32.89 | 63.5,11.59 60.96,11.59 PINS_GND1.3 | 10.61,24.14 10.61,27.47 12.07,27.47 | 12.07,27.47 12.22,27.62 v15.46,27.62 | v12.92,21.91 GUCLED.2 | GUCLED.2 | v12.92,10.48 C11.2 14.42,9.67 24.58,9.67 C10.2 | C6.2 46.17,15.57 46.47,15.88 C1.1 50.04,15.05 51.21,15.05 v51.21,13.65 C5.2 | 33.93,32.89 33.62,32.58 33.62,28.03 33.93,27.72 35.25,27.72 41.25,21.72 | 41.25,21.72 40.95,21.42 33.04,21.42 | 33.04,21.42 33.04,23.26 v31.99,24.3 U$1.19 | v15.46,27.62 15.11,27.98 C14.1 | C8.2 C9.2 | PINS_GND1.1 55.88,11.59 56.19,11.9 58.12,11.9 58.42,11.59 PINS_GND1.2 | 33.04,21.42 32.73,21.11 U$1.26 | v8.24,37.47 U$2.GND | v18.43,36.13 20.19,36.13 R6.1 | 41.25,21.72 41.56,21.42 v44.32,21.42 44.32,19.85 44.23,19.77 U$1.49 | v53.19,8.57 C3.2 | U$1.10 29.62,28.8 v29.2,28.39 27.38,28.39 27.01,28.75 17.02,28.75 C16.1 v15.46,27.62 | 12.07,27.47 REG113NA-3.1.2 | v52.55,5.08 C4.2 51.25,6.21 43.99,6.21 43.69,6.51 C15.1 43.69,10.16 C8.2 | C7.2 38.87,13.65 C8.2 | PINS_GND1.4 63.5,11.59 | 33.93,32.89 33.23,33.58 U$1.99 | GUCLED.2 10.95,23.81 10.61,24.14
  Bottom 0.152: v31.99,24.3 29.2,27.09 v29.2,28.39 | PINS_GND1.1 54.46,9.84 v53.19,8.57 | PINS_GND1.4 63.5,11.59 66.04,11.59 PINS_GND1.5 | PINS_GND1.2 58.42,11.59 58.73,11.9 60.66,11.9 60.96,11.59 PINS_GND1.3 | v18.43,36.13 18.43,37.16 | 18.43,37.16 18.13,37.47 v8.24,37.47 | v12.92,21.91 v12.92,10.48 | 18.43,37.16 18.74,37.47 20.57,37.47 20.88,37.16 20.88,30.07 20.57,29.76 17.6,29.76 v15.46,27.62 | v53.19,8.57 53.19,5.72 v52.55,5.08 | v44.32,21.42 51.62,21.42 51.92,21.11 51.92,14.96 51.21,14.26 v51.21,13.65 52.37,12.49 52.37,9.39 v53.19,8.57
I2C1_SCL
  Top 0.152: U$1.95 35.24,44.45 34.93,44.75 25.07,44.75 24.77,45.06 JP3.4
I2C1_SDA  (via drill 0.4 pad 0.7)
  Top 0.152: v22.23,44.17 34.43,44.17 34.74,43.87 U$1.96
  Bottom 0.152: v22.23,44.17 JP3.3
I2C2_SCL  (via drill 0.4 pad 0.7)
  Top 0.152: v42.73,20.56 U$1.46
  Bottom 0.152: v42.73,20.56 43.93,19.37 48.95,19.37 49.25,19.06 49.25,1.89 49.56,1.59 JP4.19
I2C2_SDA  (via drill 0.4 pad 0.7)
  Top 0.152: v51.79,11.92 44.7,11.92 44.4,12.23 44.4,16.54 43.23,17.7 U$1.47
  Bottom 0.152: v51.79,11.92 51.79,1.89 52.1,1.59 JP4.20
I2C4_SCL
  Top 0.152: U$1.59 70.21,25.3 70.94,26.04 JP5.8
I2C4_SDA
  Top 0.152: U$1.60 61.67,25.8 64.44,28.58 JP5.7
LED1  (via drill 0.4 pad 0.7)
  Top 0.152: v29.82,34.65 29.54,34.37 29.54,33.3 U$1.1 | v27.49,31.75 LED1.2
  Bottom 0.152: v27.49,31.75 27.22,32.03 27.22,34.34 27.52,34.65 v29.82,34.65
N$1
  Top 0.152: R3.2 18.86,20.5 18.56,20.2 8.41,20.2 8.1,20.5 GUCLED.1
N$1
  pour Top (isolate 0.33, no thermals): 2.23,43.5 68.9,43.5 68.9,5.08 2.85,5.4
N$2  (via drill 0.4 pad 0.7)
  Top 0.152: v24.65,31.75 LED1.1 | v31.21,36.43 v24.65,36.43 | v50.37,31.16 51.53,30 55.07,30 55.38,30.3 R4.2
  Bottom 0.152: v24.65,36.43 v24.65,31.75 | v50.37,31.16 36.93,31.16 36.62,31.47 36.62,38 36.32,38.3 33.08,38.3 v31.21,36.43
N$3  (via drill 0.4 pad 0.7)
  Top 0.152: v19.67,25.53 13.02,25.53 | 13.02,25.53 11.12,25.53 REG113NA-3.1.1 | 13.02,25.53 REG113NA-3.1.3 | v22.27,27.62 C16.2 | v52.95,10.8 C15.2 | SD1.3 v26.99,37.59 29.56,37.59 29.87,37.9 29.87,40.8 30.17,41.11 SD2.3
  Bottom 0.152: v52.95,10.8 52.95,21.98 52.65,22.28 35.09,22.28 34.78,22.59 34.78,29.8 34.48,30.11 26.91,30.11 | 26.91,30.11 22.57,30.11 22.27,29.8 v22.27,27.62 21.5,27.62 21.2,27.32 21.2,25.84 20.89,25.53 v19.67,25.53 | 26.91,30.11 26.91,37.52 v26.99,37.59
N$5
  Top 0.152: R8.1 13.52,37.23 13.22,37.54 10.95,37.54 10.64,37.84 U$2.D-
N$6
  Top 0.152: R7.1 7.17,36.38 9.54,36.38 9.84,36.68 U$2.D+
NR  (via drill 0.4 pad 0.7)
  Top 0.152: v17.91,30.34 C14.2 | v13.02,30.34 REG113NA-3.1.4
  Bottom 0.152: v13.02,30.34 v17.91,30.34
OSC_IN  (via drill 0.4 pad 0.7)
  Top 0.152: v25.93,21.7 25.93,16.51 KRISTAL.2 19.87,16.51 19.56,16.2 19.56,11.1 19.87,10.8 C10.1 | v25.5,27.89 25.58,27.8 U$1.12
  Bottom 0.152: v25.5,27.89 25.93,27.45 v25.93,21.7
OSC_OUT  (via drill 0.4 pad 0.7)
  Top 0.152: v12.92,24.61 22.37,24.61 25.07,27.3 U$1.13 | C11.1 10.37,10.48 10.06,10.78 v10.06,16.14 10.14,16.21 13.35,16.21 KRISTAL.1
  Bottom 0.152: v10.06,16.14 10.06,21.75 v12.92,24.61
PA8  (via drill 0.4 pad 0.7)
  Top 0.152: v34.2,28.97 34.54,29.3 U$1.67 | v21.69,41.91 R5.1 | v21.69,37.47 R6.2
  Bottom 0.152: v21.69,41.91 v21.69,37.47 21.69,29.62 18.79,26.73 18.79,24.95 19.09,24.65 22.57,24.65 22.88,24.95 22.88,28.66 23.18,28.97 v34.2,28.97
RESET  (via drill 0.4 pad 0.7)
  Top 0.152: v38.36,23.56 35.11,26.8 U$1.14 25.74,26.8 22.96,24.02 13.81,24.02 13.5,23.72 13.5,20.81 13.2,20.5 9.44,20.5 9.13,20.81 9.13,23.23 8.83,23.53 1.91,23.53 JP2.9 | v53.92,19.95 65.55,19.95 65.85,19.65 C17.2 | v7.66,6.67 R2.1
  Bottom 0.152: v53.92,19.95 53.92,23.26 53.61,23.56 v38.36,23.56 | JP2.9 7.35,22.54 7.66,22.24 v7.66,6.67
SWDCLK  (via drill 0.4 pad 0.7)
  Top 0.152: v54.62,36.99 45.04,36.99 44.73,36.68 U$1.76
  Bottom 0.152: v54.62,36.99 62.44,44.81 72.72,44.81 73.03,45.11 JP3.23
SWDIO  (via drill 0.4 pad 0.7)
  Top 0.152: v47.99,31.8 U$1.72
  Bottom 0.152: v47.99,31.8 46.04,33.76 SWDIO1.1
USBDM  (via drill 0.4 pad 0.7)
  Top 0.152: v34.78,30.89 45.41,30.89 45.49,30.8 U$1.70 | v28.65,34.07 27.48,35.24 R8.2
  Bottom 0.152: v28.65,34.07 34.48,34.07 34.78,33.76 v34.78,30.89
USBDP  (via drill 0.4 pad 0.7)
  Top 0.152: v34.2,31.74 43.51,31.74 43.95,31.3 U$1.71 | v27.8,34.07 9.97,34.07 R7.2
  Bottom 0.152: v27.8,34.07 28.68,33.18 32.76,33.18 v34.2,31.74
VCAP1  (via drill 0.4 pad 0.7)
  Top 0.152: v43.73,20.56 U$1.48 | v51.34,15.88 C1.2
  Bottom 0.152: v51.34,15.88 51.34,20.26 51.04,20.56 v43.73,20.56
VCAP2  (via drill 0.4 pad 0.7)
  Top 0.152: v53.25,35.56 C2.2 | v44.87,32.3 U$1.73
  Bottom 0.152: v44.87,32.3 44.87,41.48 45.17,41.78 46.9,41.78 47.21,41.48 47.21,36.31 47.04,36.15 47.04,33.66 47.35,33.36 47.9,33.36 48.21,33.66 48.21,35.26 48.51,35.56 v53.25,35.56
VUSB  (via drill 0.4 pad 0.7)
  Top 0.152: R5.2 26.04,41.91 v26.64,42.52 v28.88,42.52 | PINS_5V1.2 58.74,3.34 61.28,3.34 PINS_5V1.3 | PINS_5V1.4 63.82,3.34 66.36,3.34 PINS_5V1.5 | v11.44,38.42 U$2.VBUS | v26.04,39.96 SD1.1
  Bottom 0.152: PINS_5V1.2 58.74,3.34 58.43,3.65 56.87,3.65 | 56.87,3.65 56.87,26.43 56.57,26.73 36.62,26.73 36.32,27.04 36.32,35.23 36.01,35.54 29.18,35.54 28.88,35.84 v28.88,42.52 | 56.87,3.65 56.5,3.65 56.2,3.34 PINS_5V1.1 | v11.44,38.42 18.58,38.42 18.89,38.73 18.89,42.19 19.19,42.49 23.78,42.49 24.36,41.91 25.73,41.91 | 25.73,41.91 25.73,42.21 26.04,42.52 v26.64,42.52 | PINS_5V1.3 61.28,3.34 63.82,3.34 PINS_5V1.4 | 25.73,41.91 26.04,41.61 v26.04,39.96

## Text on the board
tPlace: JP3 | U$2 | R5 | SD1 | SD2 | 5V_IN1 | SWDIO1 | R6 | R7 | R8 | U$1 | C2 | C13 | C14 | LED1 | JP1 | R4 | C12 | C16 | REG113NA-3.1 | JP5 | R3 | GUCLED | KRISTAL | C17 | C1 | C7 | C6 | C5 | R1 | JP2 | C10 | C15 | C11 | C8 | PINS_GND1 | C3 | R2 | C9 | PINS_3V1 | C4 | JP6 | JP4 | PINS_5V1